# Altium PCB MS7312L_RX_V1.0.PcbDoc
Units mil, origin at the board's own origin, x right, y up, seen from the top; angles counter-clockwise.
Board outline 879.03 x 1172.03 mil, 2 copper layers (Top Layer, Bottom Layer); 28 components, 17 nets, 96 pads, 17 vias.
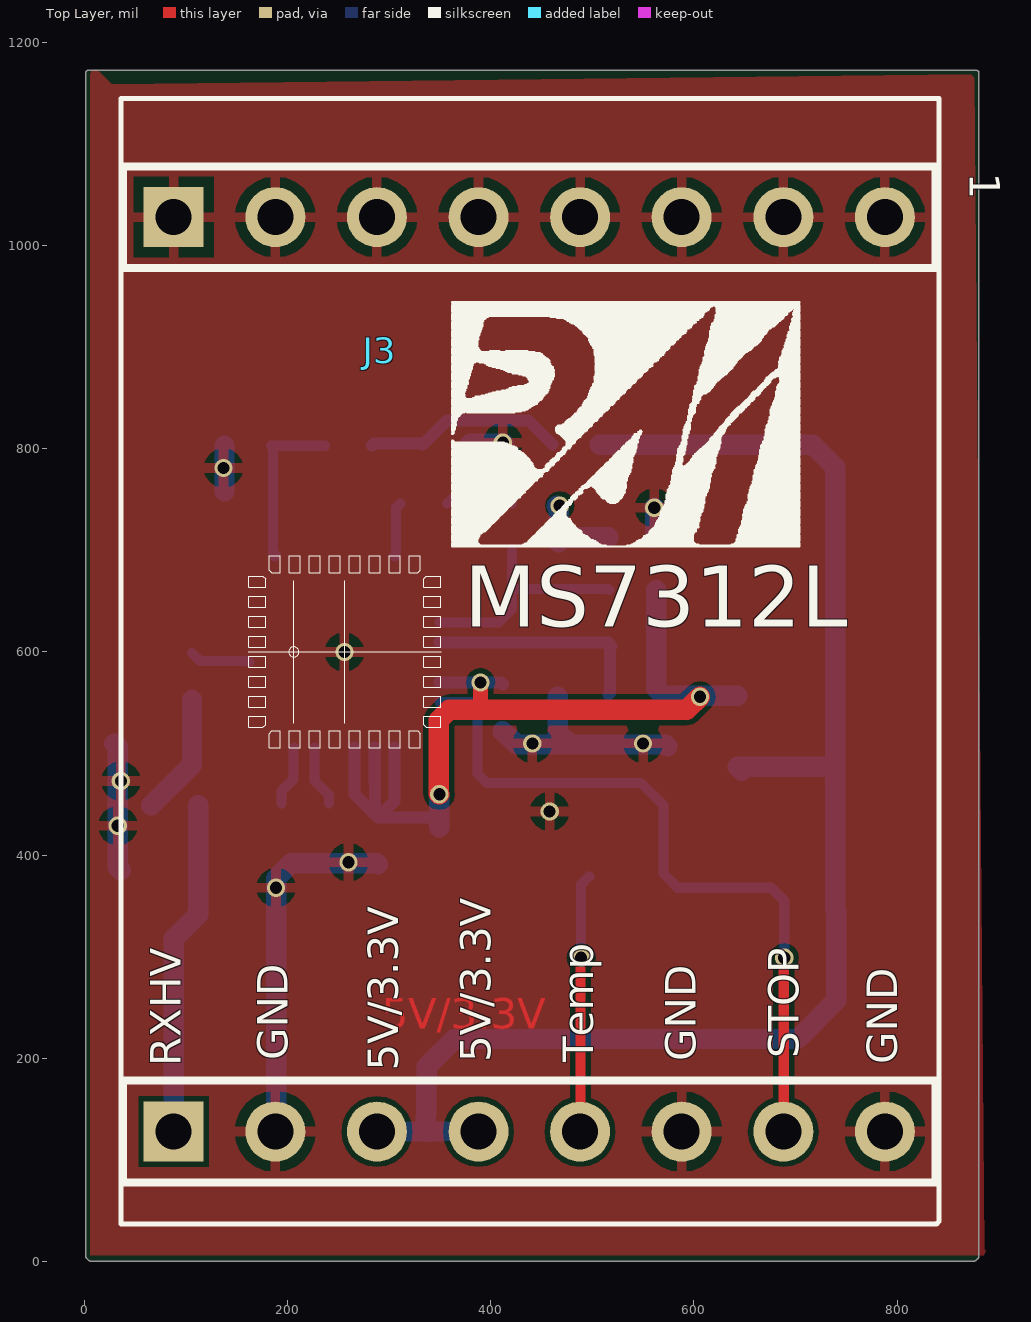
[diagram p0: Top Layer view]
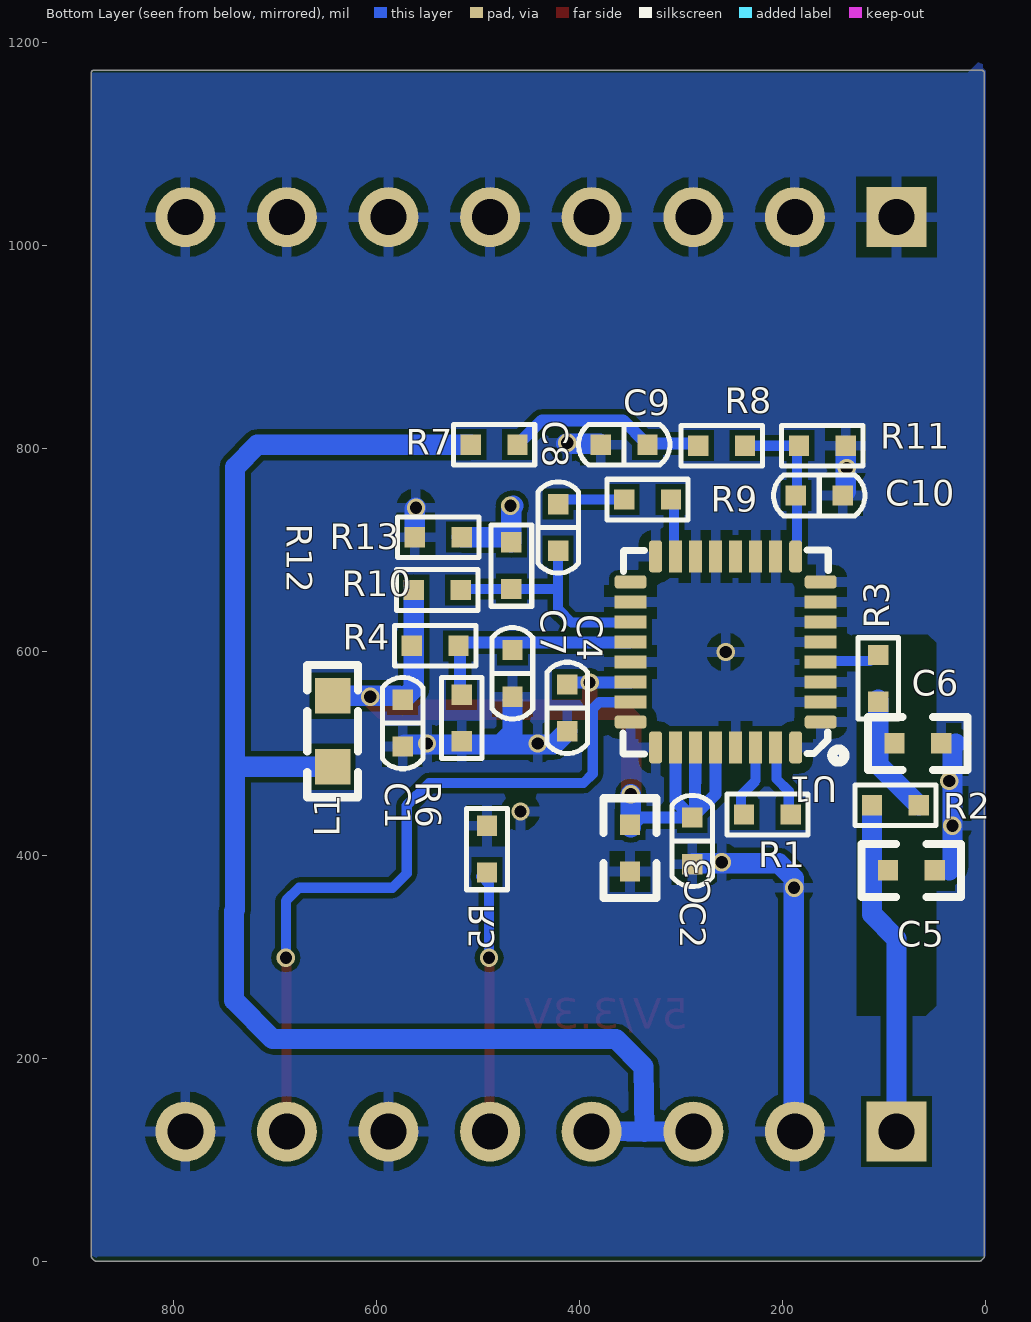
[diagram p1: Bottom Layer view, seen from below]
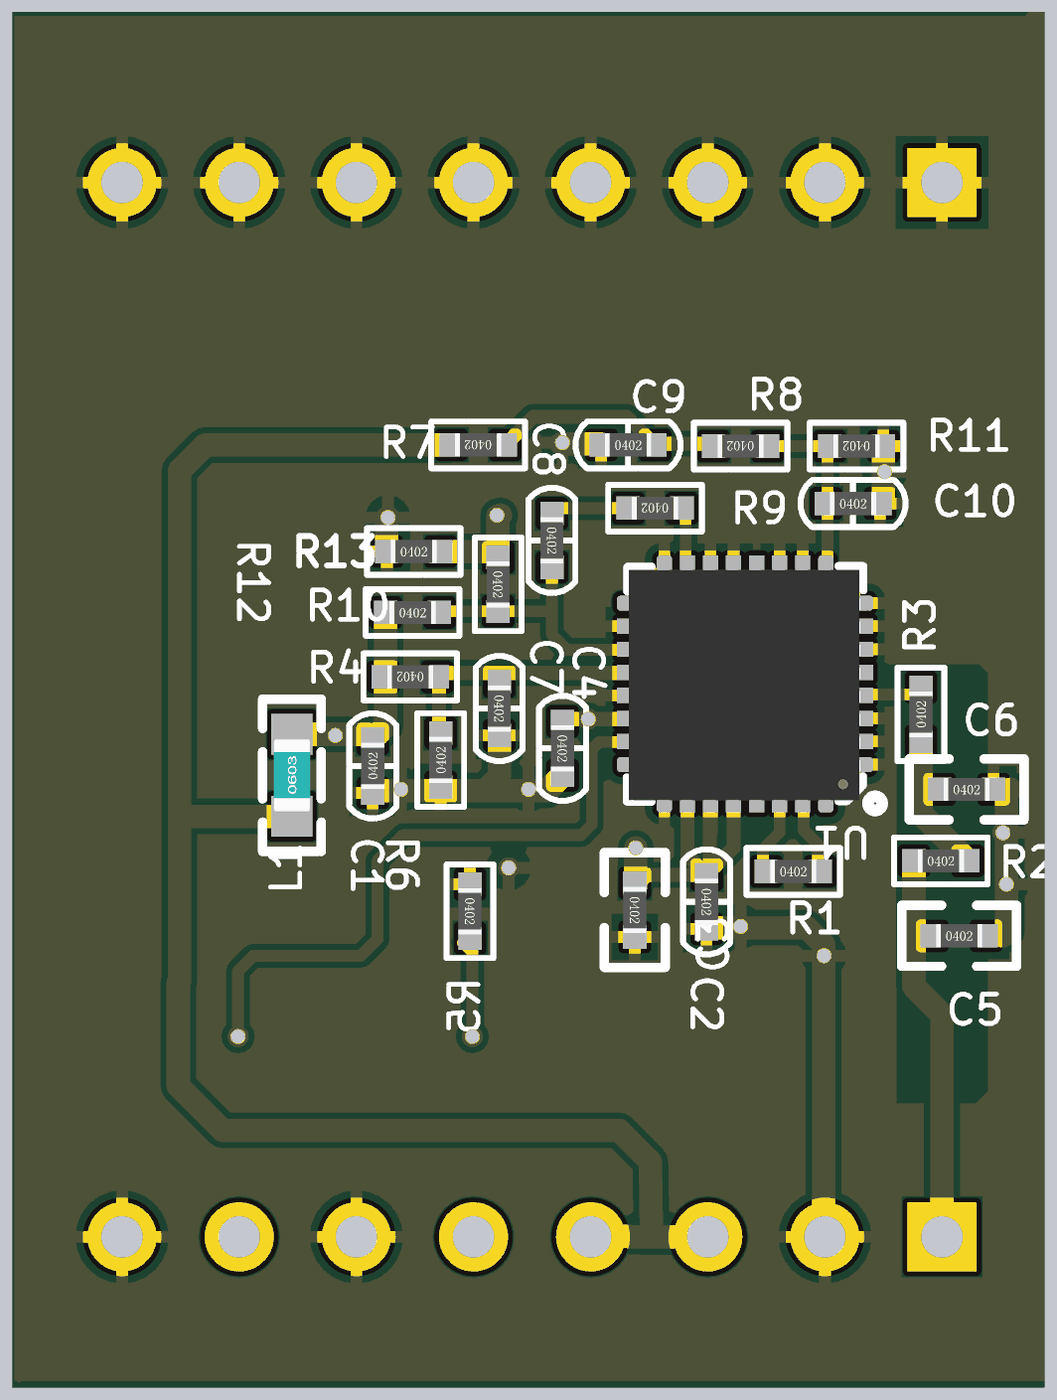
[diagram p2: 3D render of the assembled board from below, using the file's embedded part models]

## Layer stack, top to bottom
Top Solder: solder mask 0.4, Solder Resist, Dk 3.5
Top Layer: signal copper 1.4
Dielectric1: core 12.6, FR-4, Dk 4.8
Bottom Layer: signal copper 1.4
Bottom Solder: solder mask 0.4, Solder Resist, Dk 3.5

## Board outline
1.48,5 ccw(c4,5) 2.22,3.22 4.22,1.22 ccw(c6,3) 6,0.49 876,0.49 ccw(c876,3) 877.78,1.22 879.78,3.22 ccw(c878,5) 880.51,5 880.51,1170 ccw(c878,1170) 878,1172.51 5,1172.51 ccw(c5,1170) 4.5,1172.46 ccw(c4,1170) 1.48,1170

## Design rules (kind name [scope] priority, off if disabled: settings)
Clearance Clearance_1 [All] p1: gap=5 ignorepadtopadclearanceinfootprint=FALSE except(0: Arc-Hole Track-Hole SMDPad-Hole THPad-Hole Via-Hole Fill-Hole Poly-Hole Region-Hole Text-Hole)
Clearance [All] p2: gap=4 ignorepadtopadclearanceinfootprint=FALSE except(0: Arc-Hole Track-Hole SMDPad-Hole THPad-Hole Via-Hole Fill-Hole Poly-Hole Region-Hole Text-Hole)
ComponentClearance [All] p1: gap=5 collisioncheckmode=3 verticalgap=10 showdistances=FALSE
PolygonConnect [All] p1: connectstyle=Relief reliefconductorwidth=10 reliefentries=4 polygonreliefangle="90 Angle" airgapwidth=10
RoutingVias [All] p1: holewidth=28 width=50 viastyle="Through Hole" minholewidth=28 minwidth=50 maxholewidth=28 maxwidth=50
SilkToSolderMaskClearance SilkscreenOverComponentPads [IsPad] p1: minsilkscreentomaskgap=10 clearancetoexposedcopper=TRUE
SolderMaskExpansion [All] p1: expansion=4
Width [All] p1: maxlimit=100 minlimit=4 preferedwidth=10
28 further rules are at their usual default settings.

## Classes and differential pairs
component class MS7312L: C1 C2 C3 C4 C7 C8 L1 R1 R2 R4 R5 R8 R11 U1

## Components (designator, comment, footprint, x,y, rotation, side; value= is the part's Value field where it differs from the comment)
1 "Header 8" HDR1X8 88,1028 r0 top (schematic designator P5)
C1 "10μF" 0402C 574,530 r90 bottom
C2 "0.1μF" 0402C 289,414 r270 bottom
C3 "GRM155R71H102KA01D" 0402C 350.3,407 r270 bottom value=10μF
C4 "0.1μF" 0402C 412,545 r270 bottom
C5 "22nF/250V" 0402C 73.4,385 r180 bottom
C6 "680pF/250V" 0402C 67,510 r180 bottom
C7 "0.1μF" 0402C 466,579 r270 bottom
C8 "1000pF" 0402C 421,722.52 r270 bottom
C9 "0.1μF" 0402C 356,804 r180 bottom
C10 "0.1μF" 0402C 164,754 r180 bottom
J3 "LOGO" RELMON2 291,897 r0 top
L1 "BLM18PG221SN1" "L 0603" 643,522 r90 bottom value=HZ1608U102TF
P5 "Header 8" HDR1X8 88,128 r0 top
R1 "20k 1%" 0402 215,440 r180 bottom
R2 "100k" 0402 89,449 r180 bottom
R3 "1k" 0402 106,574 r90 bottom
R4 "10k" 0402 542,606 r0 bottom
R5 "10K" 0402 491,406 r270 bottom
R6 "3.3k 1%" 0402 516,535 r90 bottom
R7 "10R" 0402 484,804 r0 bottom
R8 "10k 1%" 0402 260,803 r0 bottom
R9 "100R 1%" 0402 333,750 r0 bottom
R10 "10k" 0402 540,661 r180 bottom
R11 "20k 1%" 0402 161,803 r0 bottom
R12 "330R 1%" 0402 467,685 r270 bottom
R13 "3.3k 1%" 0402 539,713 r180 bottom
U1 "MS7312L" MS7312L 256.15,600.02 r0 bottom

## Footprints (in the part's own frame and the unit in brackets; to place one, negate y for a bottom-side part, rotate by r counter-clockwise, add the part's x,y. Pads: shape width x height; smd on the part's side, far side on the other; paste and mask are expansions set on the pad)
0402 [mil]
  rect 20x20 smd: 1(-23,0) 2(23,0)
  silkscreen extent -40,-20 40,20, body extent -20,-10 20,10, height 14
0402C [mil]
  rect 20x20 smd: 1(-23,0) 2(23,0)
  silkscreen extent -45,-20 45,20, body extent -20,-10 20,10, height 14
HDR1X8 [mm] "Connector; Header; 8 Position"
  rect 1.5x1.5 hole 0.9: 1(0,0)
  round 1.5 hole 0.9: 2(2.54,0) 3(5.08,0) 4(7.62,0) 5(10.16,0) 6(12.7,0) 7(15.24,0) 8(17.78,0)
  silkscreen extent -1.27,-1.27 19.05,1.27
"L 0603" [mil] "小功率贴片电感"
  rect 35x35 smd: 1(-35,0) 2(35,0)
  silkscreen extent -65,-25 65,25, body extent -31,-16 31,16, height 31
MS7312L [mil] "QFN32"
  rrect50% 31.5x13 smd: 1(-93.58,68.92) 8(-93.58,-68.92) 17(93.58,-68.91) 24(93.58,68.91)
  rect 31.5x13 smd: 2(-93.58,49.22) 3(-93.58,29.54) 4(-93.58,9.85) 5(-93.58,-9.85) 6(-93.58,-29.54) 7(-93.58,-49.22) 18(93.58,-49.22) 19(93.58,-29.54) 20(93.58,-9.85) 21(93.58,9.85) 22(93.58,29.54) 23(93.58,49.22)
  rrect50% 13x31.5 smd: 9(-68.91,-93.98) 16(68.92,-93.98) 25(68.92,93.98) 32(-68.91,93.98)
  rect 13x31.5 smd: 10(-49.23,-93.98) 11(-29.53,-93.98) 12(-9.84,-93.98) 13(9.85,-93.98) 14(29.54,-93.98) 15(49.23,-93.98) 26(49.23,93.98) 27(29.54,93.98) 28(9.85,93.98) 29(-9.84,93.98) 30(-29.53,93.98) 31(-49.23,93.98)
  silkscreen extent -117,-100 101,108, body extent -98,-98 99,100, height 31
RELMON2 [mil]
  silkscreen extent 71,-193 413,47

## Part data
1 P5: "Header, 8-Pin"
C1 C2 C4 C5 C6 C7 C8 C9 C10: library part CAP, "Capacitor"
C3: library part CAP, "Murata - 1nF, 50V, X7R, 10%"
J3: library part CON1, "Connector"
L1: library part INDUCTOR, "HZ1608U102TF", Manufacturer=˳?, Package="L 0603", PartNumber=HZ1608U102TF
R1 R2 R3 R4 R5 R6 R7 R8 R9 R10 R11 R12 R13: library part RES1

## Via types
v1: diameter 18, hole 12, Top Layer to Bottom Layer, tented both sides, 17 vias

## Nets (pads, with @x,y where several pads share a name; then routed paths per layer and width w, separated by ;. In a path a pad name is that pad's centre, name@x,y a point inside that pad or via, vN(x,y) a via of type N, cw(c..) or ccw(c..) an arc to the next point about the centre after c; other vN are vias at no path point)
5V: L1.1 P5.3 P5.4 R7.2 | length 1468.2
  Bottom Layer w20: P5.3@287,128 P5.3 336,128 ; P5.4@391,129 387.98,128.94 336.08,127.92 336,128 ; R7.2 717,804 739,782 739,482 ; L1.1@647,483 L1.1 734,487 739,482 ; 336,128 337,192 364,219 702,219 740,257 740,345 739,346 739,482
5VC: C1.2 C2.1 C3.1 C4.1 L1.2 R4.2 R10.1 U1.22 U1.26 U1.27 U1.28 | length 965.8
  Top Layer w15: 390,543 v1(390,569.99)
  Top Layer w20: v1(349.49,460) 349,460.49 349,533 359,543 390,543 593,543 v1(606,556)
  Bottom Layer w12: U1.28 266,460 C2.1@286.19,439.81 ; 285.69,471.69 U1.27 ; U1.27 286.19,505.55 C2.1@286.19,439.81 ; U1.26 305.38,453.38 C2.1 ; C3.1@349.49,427.51 340,437 C2.1 ; U1.22 349.49,570.24 349.75,569.99 v1(390,569.99) 410.01,569.99 C4.1 ; C2.1@286.19,439.81 C2.1
  Bottom Layer w20: C3.1@349.49,427.51 v1(349.49,460) ; R10.1 563,564 C1.2 578,557 L1.2
GND: 1.1 1.2 1.3 1.4 1.5 1.6 1.7 1.8 C1.1 C2.2 C3.2 C4.2 C5.2 C6.2 C7.2 C9.1 C10.2 P5.2 P5.6 P5.8 R5.1 R6.1 R11.1 R13.1 U1.1 U1.2 U1.3 U1.5 U1.6 U1.7 U1.8 U1.10 U1.11 U1.13 U1.14 U1.16 U1.18 U1.21 U1.24 U1.25 U1.29 U1.32 | length 812.7
  Bottom Layer w20: 29.6,510 32.8,506.8 32.8,388.2 36,385 ; C10.2@138,758 R11.1 ; P5.2 189,129 189,377.28 203.72,392 288,392 C2.2 ; C9.1 380,805 v1@413,805 ; C4.2 425,509 477.72,509 ; C7.2 466,520.72 477.72,509 ; v1(561,742) 562,741 R13.1 ; C1.1 572,509 477.72,509
  other v1: 188.74,368 260,393 33,429 458,443 36,473 441,510 550,510 256,600 137,781 412,806
NetC6_1: C6.1 R2.2 R3.1 | length 120.6
  Bottom Layer w20: R2.2 106,489 106,510 R3.1@106,553
NetC8_1: C8.1 R9.2 | length 67.5
  Bottom Layer w10: R9.2@357,746 361,750 416.52,750 C8.1
NetC8_2: C8.2 R10.2 R12.2 U1.19 | length 231.2
  Bottom Layer w10: U1.19 350.3,629 408,629 421,642 421,661 ; C8.2 421,661 ; R10.2 516,662 R12.2 422,662 421,661
NetC9_2: C9.2 R7.1 R8.2 | length 199.7
  Bottom Layer w11.81: R8.2 285,805 C9.2@334,805 ; C9.2 C9.2@334,805 ; R7.1 437,828 357,828 C9.2@334,805
NetC10_1: C10.1 R8.1 R11.2 U1.9 | length 165.5
  Bottom Layer w10: U1.9@188.74,695.5 U1.9 185.74,695.5 185.74,758 185.74,801.26 R11.2 R8.1
NetR1_1: R1.1 U1.30 | length 61
  Bottom Layer w10: U1.30 226.62,473.38 241,459 241,451
NetR1_2: R1.2 U1.31 | length 60.4
  Bottom Layer w10: 194,451 194,463 206,475 206,505.12 U1.31
NetR3_2: R3.2 U1.4 | length 60.2
  Bottom Layer w10: R3.2@106,599 114,591 161.75,591 U1.4
NetR9_1: R9.1 U1.15 | length 54.9
  Bottom Layer w10: U1.15@305,694.38 U1.15 306.88,695.5 306.88,741.88 R9.1@311,746
NetR12_1: R12.1 R13.2 | length 87.9
  Bottom Layer w20: v1@465,744 467,742 R12.1 472,713 R13.2
  other v1: 468,744
RXHV: C5.1 P5.1 R2.1 | length 330.9
  Bottom Layer w20: P5.1 88,317.73 112,341.73 R2.1
STOP: P5.7 U1.23 | length 733.5
  Top Layer w10: P5.7@687,117 688.5,118.5 688.5,298.5 v1(689,299)
  Bottom Layer w10: U1.23 350.02,550.51 380.49,550.51 387,544 387,480 396,471 548,471 570,449 570,382 584,368 676,368 689,355 v1@689,301.41
Temp_Sensor: P5.5 R5.2 | length 254
  Top Layer w10: P5.5 488.5,128.5 488.5,298.5 v1(489,299) v1@490,298
  Bottom Layer w10: v1@489,301.41 489,371.5 496.5,379 R5.2@497,379
VIN+: C7.1 R4.1 R6.2 U1.20 | length 220.1
  Bottom Layer w12: U1.20 350.24,609.37 515.63,609.37 R4.1 517.5,604.5 517.5,559.5 R6.2
pads on no net: U1.12 U1.17

## Polygon pours and split planes (outlines as drawn)
GND on Bottom Layer "GND_L02_P116" (solid, remove dead copper, pour order 116): 3,1175 0,1172 0,5 874,5 880,-1 880,1170 18,1170 3,1185
no net on Bottom Layer "NONET_L02_P110" (solid, remove dead copper, pour order 110): 1855,1185
no net on Bottom Layer "GNDS" (solid, remove dead copper, pour order 27): -358.02,473
no net on Bottom Layer "GNDS" (solid, remove dead copper, pour order 13): -2979.02,1447
GND on Top Layer "GND_L01_P112" (solid, remove dead copper, pour order 112): 6,1168 6,6 892,6 886,12 876,1168.48 27,1159 9,1177
no net on Top Layer "Top Layer-No Net" (solid, pour order 47): 579,-13
GND on Top Layer "GNDS" (solid, remove dead copper, pour order 19): -6369.02,1436
no net on Top Layer "GNDS" (solid, remove dead copper, pour order 17): -2580.02,1598
no net on Top Overlay "NONET_L-01_P-001" (solid, remove dead copper): -146,1212

## Other copper
Top Layer:
  text "5V/3.3V" at 293,229 h30
Bottom Layer:
  pour cut-out: 79,617 57,617 49,609 49,252 59,242 127,242 127,579 130,582 135,582 135,611 136,612 131,617 94,617 88,617

## Silkscreen, mask and mechanical layers (free items; w line width, h text height)
Top Overlay:
  lines w5: 36.24,37 36.24,1137 36.24,1144.76 841.24,1144.76 841.36,1144.64 841.36,39.64 838.72,37 36.24,37
  text "MS7312L" at 374,625 h60
  text "STOP" at 703,200 h30 r90
  text "GND" at 200,198 h30 r90
  text "GND" at 602,197 h30 r90
  text "5V/3.3V" at 400,196 h30 r90
  text "Temp" at 501,196 h30 r90
  text "GND" at 800,194 h30 r90
  text "RXHV" at 95,192 h30 r90
  text "5V/3.3V" at 309,188 h30 r90
Mechanical 1:
  lines w5: 4,1170 4,5 6,3 876,3 878,5 878,1170 5,1170